# EAGLE board adafruit-cc3000-breakout (EAGLE 6.3)
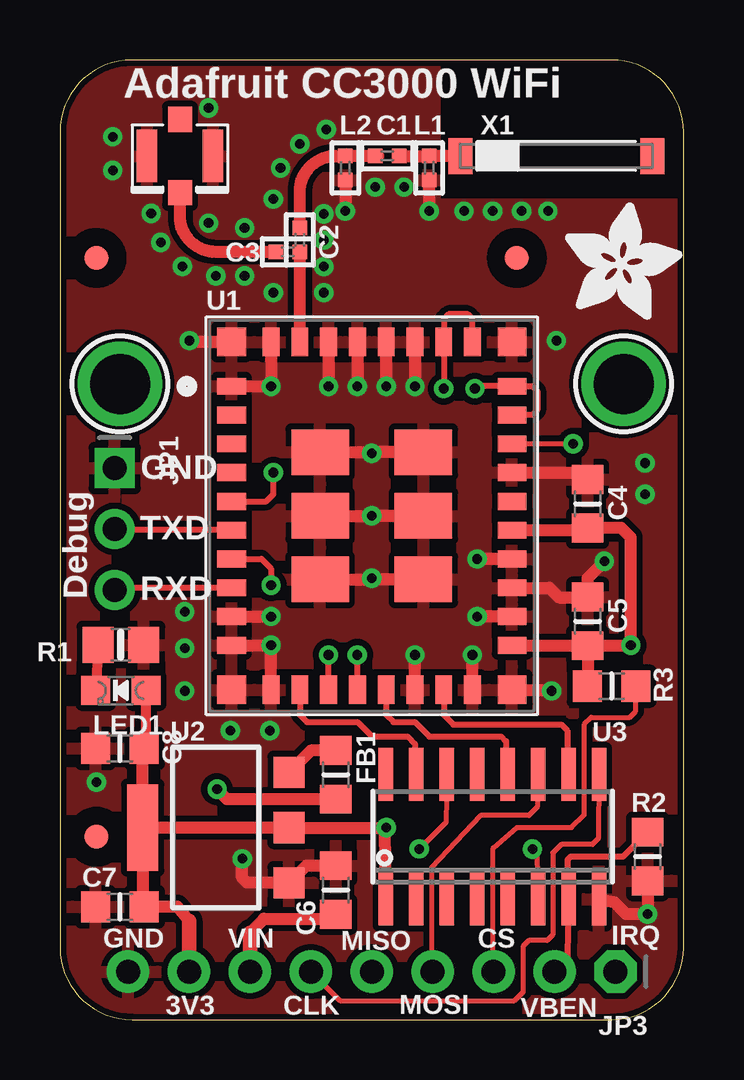
[diagram p0: board, top side]
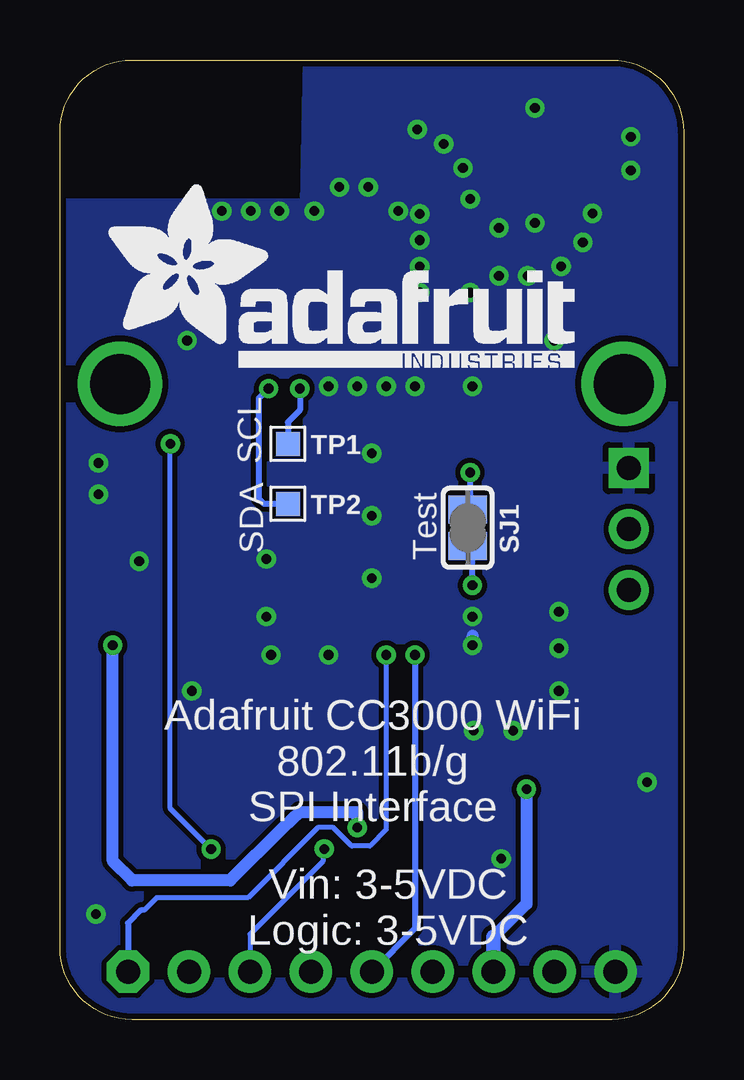
[diagram p1: board, bottom side, seen from below]

Size 26 x 40 mm. Coordinates in mm from the lower left corner, seen from the top.
Outline: 0,3 arc90 3,0 23,0 arc90 26,3 26,37 arc90 23,40 3,40 arc90 0,37 0,3
Copper layers (1*16): Top 0.035mm / dielectric 1.5mm / Bottom 0.035mm
Design rules "adafruit": minimum track width 8mil, minimum drill 15.5mil, track to track 8mil, track to pad 8mil, pad to pad 8mil, via to via 8mil, smd to smd 8mil, copper to edge 10mil, drill to drill 8mil, minimum pad ring 10mil, minimum via ring 8mil, stop-mask expansion 4mil, vias tented up to drill 20mil, thermal gap 10mil

## Footprints (pad centres in the part's own frame; a part is rotated, then mirrored left to right if it is on the bottom)
_0402 = smd 0.6 x 0.6: 1 -0.508,0; 2 0.508,0
_0805MP = smd 1.2 x 1.3: 1 -1.016,0; 2 1.016,0
FIDUCIAL_1MM = smd 1 x 1: 1 0,0
1X03_ROUND = drill 1 pad 1.676 square: 1 -2.54,0 | drill 1 pad 1.676: 2 0,0; 3 2.54,0
1X09_ROUND_70 = drill 1 pad 1.778 octagon: 1 -10.16,0 | drill 1 pad 1.778: 2 -7.62,0; 3 -5.08,0; 4 -2.54,0; 5 0,0; 6 2.54,0; 7 5.08,0; 8 7.62,0; 9 10.16,0
CHIPLED_0805_NOOUTLINE = smd 1.2 x 1.2: A 0,-1.05; C 0,1.05
0805-NO = smd 1.3 x 1.5: 1 -0.95,0; 2 0.95,0
SOLDERJUMPER_CLOSEDWIRE = smd 1.168 x 1.6: 1 -0.762,0; 2 0.762,0 | smd 0.635 x 0.203: WIRE 0,0
TESTPOINT_PAD_1MM = smd 1 x 1: P$1 0,0
CC3000MOD = smd 1.2 x 0.7: 1 -5.85,5.4; 2 -5.85,4.2; 3 -5.85,3; 4 -5.85,1.8; 5 -5.85,0.6; 6 -5.85,-0.6; 7 -5.85,-1.8; 8 -5.85,-3; 9 -5.85,-4.2; 10 -5.85,-5.4; 19 5.85,-5.4; 20 5.85,-4.2; 21 5.85,-3; 22 5.85,-1.8; 23 5.85,-0.6; 24 5.85,0.6; 25 5.85,1.8; 26 5.85,3; 27 5.85,4.2; 28 5.85,5.4 | smd 0.7 x 1.2: 11 -4.2,-7.25; 12 -3,-7.25; 13 -1.8,-7.25; 14 -0.6,-7.25; 15 0.6,-7.25; 16 1.8,-7.25; 17 3,-7.25; 18 4.2,-7.25; 29 4.2,7.25; 30 3,7.25; 31 1.8,7.25; 32 0.6,7.25; 33 -0.6,7.25; 34 -1.8,7.25; 35 -3,7.25; 36 -4.2,7.25 | smd 2.4 x 1.9: 37 -2.15,2.65; 38 -2.15,0; 39 -2.15,-2.65; 40 2.15,2.65; 41 2.15,0; 42 2.15,-2.65 | smd 1.2 x 1.2: 43 -5.85,7.25; 44 -5.85,-7.25; 45 5.85,-7.25; 46 5.85,7.25
SOT223-R = smd 1.3 x 1.3: 1 -2.3,-3.05; 2 0,-3.05; 3 2.3,-3.05 | smd 3.6 x 1.3: 4 0,3.05
SOIC16 = smd 0.6 x 2.2: 1 -4.445,-2.6; 2 -3.175,-2.6; 3 -1.905,-2.6; 4 -0.635,-2.6; 5 0.635,-2.6; 6 1.905,-2.6; 7 3.175,-2.6; 8 4.445,-2.6; 9 4.445,2.6; 10 3.175,2.6; 11 1.905,2.6; 12 0.635,2.6; 13 -0.635,2.6; 14 -1.905,2.6; 15 -3.175,2.6; 16 -4.445,2.6
MOUNTINGHOLE_2.5_PLATED = drill 2.5 pad 3.2: P$1 0,0
U.FL = smd 2.2 x 0.85: P$1 0,1.375; P$2 0,-1.375 | smd 1.05 x 1: P$3 1.525,0; P$4 -1.525,0
ANT_2500AT44M0400 = smd 1 x 1.5: FEED 4,0; NC -4,0

## Placement (x,y rotation side)
C1  2.2pF  [_0402]  13.65,36 0 top
C2  10pF  [_0402]  10,32.5 270 top
C3  DNC_10pF  [_0402]  9.5,32 180 top
C4  1µF  [_0805MP]  22,21.5 90 top
C5  1µF  [_0805MP]  22,16.6 90 top
C6  10µF  [_0805MP]  11.5,5.4 90 top
C7  10µF  [_0805MP]  2.5,4.7 180 top
C8  10µF  [_0805MP]  2.5,11.3 180 top
FB1  [_0805MP]  11.5,10.2 90 top
FID1  FIDUCIAL""  [FIDUCIAL_1MM]  19.05,31.75 0 top
FID2  FIDUCIAL""  [FIDUCIAL_1MM]  1.52,7.62 0 top
FID3  FIDUCIAL""  [FIDUCIAL_1MM]  1.52,31.75 0 top
JP1  [1X03_ROUND]  2.29,20.45 270 top
JP3  [1X09_ROUND_70]  13,2 180 top
L1  DNP  [_0402]  15.39,35.5 90 top
L2  2.2nH  [_0402]  11.9,35.5 90 top
LED1  green  [CHIPLED_0805_NOOUTLINE]  2.54,13.72 90 top
R1  470  [0805-NO]  2.54,15.62 180 top
R2  10K  [_0805MP]  24.5,6.8 90 top
R3  10K  [_0805MP]  23,13.9 0 top
SJ1  TESTMODE  [SOLDERJUMPER_CLOSEDWIRE]  9,20.5 90 bottom
TP1  SCL  [TESTPOINT_PAD_1MM]  16.5,24 0 bottom
TP2  SDA  [TESTPOINT_PAD_1MM]  16.5,21.5 0 bottom
U1  CC3000MOD  [CC3000MOD]  13,21 0 top
U2  [SOT223-R]  6.5,8 90 top
U3  74HC4050D  [SOIC16]  18.03,7.62 0 top
U$8  [ADAFRUIT_5MM]  21.07,29.18 0 top
U$24  MOUNTINGHOLE2.5  [MOUNTINGHOLE_2.5_PLATED]  2.5,26.5 0 top
U$34  MOUNTINGHOLE2.5  [MOUNTINGHOLE_2.5_PLATED]  23.5,26.5 0 top
U$35  U.FL  [U.FL]  5,36 270 top
U$36  [ADAFRUIT_TEXT_20MM]  24.13,27.18 0 bottom
X1  2500AT44M0400E  [ANT_2500AT44M0400]  20.69,36 180 top

## Library data of the parts
C1-C8 FB1 L1 L2 LED1 R1-R3 SJ1 TP1 TP2 U1-U3 U$8 U$35 U$36 X1 = microbuilder
FID1 FID2 U$24 U$34 = microbuilder; BOM: EXCLUDE
FID3 = microbuilder; BOM: EXCLUDE; COMPANY: ADAFRUIT INDUSTRIES; DRAWN: KTOWN; REV: C
JP1 JP3 = microbuilder; COMPANY: ADAFRUIT INDUSTRIES; DRAWN: KTOWN; REV: C

## Nets
GND: C4.2 C5.2 C6.2 C7.2 C8.2 JP1.1 JP3.9 L1.1 L2.1 R1.1 R2.1 U1.1 U1.9 U1.10 U1.11 U1.16 U1.18 U1.20 U1.21 U1.22 U1.25 U1.31 U1.32 U1.33 U1.34 U1.36 U1.37 U1.38 U1.39 U1.40 U1.41 U1.42 U1.43 U1.44 U1.45 U1.46 U2.1 U3.8 U$35.P$1 U$35.P$2
N$1: C1.2 L1.2 X1.FEED
N$2: C1.1 C2.1 L2.2
N$3: C3.2 U$35.P$3
N$4: C2.2 C3.1 U1.35
N$5: SJ1.2 U1.5
N$6: SJ1.1 U1.7
N$7: LED1.C R1.2
N$9: FB1.2 U2.3
RXD_3V: JP1.3 U1.8
SCL_3V: TP1.P$1 U1.29 U1.30
SDA_3V: TP2.P$1 U1.27 U1.28
SPI_CLK_3V: U1.17 U3.10
SPI_CLK_5V: JP3.6 U3.9
SPI_CS_3V: U1.12 U3.15
SPI_CS_5V: JP3.3 R3.2 U3.14
SPI_IRQ_3V: JP3.1 U1.14
SPI_MISO_3V: JP3.5 U1.13
SPI_MOSI_3V: U1.15 U3.12
SPI_MOSI_5V: JP3.4 U3.11
TXD_3V: JP1.2 U1.6
VBAT: C4.1 C5.1 C7.1 C8.1 JP3.8 LED1.A R3.1 U1.19 U1.23 U2.2 U2.4 U3.1
VBAT_EN_3V: U1.26 U3.6
VBAT_EN_5V: JP3.2 R2.2 U3.7
VIN: C6.1 FB1.1 JP3.7

## Tracks (layer width: path | path; a pad name or v marks a point on that pad's centre or on a via)
GND  (via drill 0.4)
  Top 0.5: U1.10 v8.8,15.6 U1.11 | U1.9 v8.8,16.8 | U1.37 12.95,23.65 v13,23.6 13.05,23.65 U1.40 | U1.38 v13,21 U1.41 | U1.39 12.95,18.35 v13,18.4 13.05,18.35 U1.42 | v22.7,19.1 22,18.4 C5.2 21.98,17.6 20.8,17.6 20.4,18 U1.21 | U1.25 21.72,22.8 C4.2 | U1.22 v17.4,19.2 | U1.20 v17.4,16.8 | U1.16 v14.8,15.2 | U1.18 v17.2,15.2 | U1.45 20.45,13.75 v20.5,13.7 | R2.1 v24.5,4.4 23.6,4.4 23.1,4.9 U3.8 | C6.2 10.27,6.42 U2.1 7.8,5.7 7.6,5.9 v7.6,6.7 | 1.5,4.68 C7.2 | U1.1 v8.8,26.4 U1.36 | U1.34 v11.2,26.4 | U1.33 v12.4,26.4 | U1.32 v13.6,26.4 | U1.31 v14.8,26.4 | U1.43 5.45,28.25 v5.4,28.3 | L2.1 v11.9,33.7 | L1.1 v15.39,33.7
  Bottom 0.5: v8.8,15.6 8.8,16
  other vias: 5.2,13.7 11,30.3 8.9,30.3 7.7,33 6.2,33.2 7.7,31 6.5,31 5.1,31.4 8.9,34.2 9.2,35.5 10,36.5 11.1,37.1 13.15,34.7 14.35,34.7 2.2,36.8 2.2,35.4 6.2,38 4.2,32.4 3.8,33.6 20.7,28.3 24.4,23.2 24.4,21.9 16.85,33.7 18.05,33.7 19.25,33.7 20.35,33.7 11,33.59 11,32.49 11,31.39 1.52,9.89 5.2,15.48 5.2,17 7.11,12.05 8.76,12.05
  pour Bottom: 3,0 23,0 arc90 26,3 26,34 15.75,34 15.62,40 3,40 arc90 0,37 0,3 arc90
  pour Top (isolate 0.254): 15.62,40 15.62,34 26,34 26,3 arc-90 23,0 3,0 arc-90 0,3 0,37 arc-90 3,40
N$1
  Top 0.508: C1.2 15.48,36 | L1.2 X1.FEED
  Top 0.584: 15.48,36 arc90 L1.2
N$2
  Top 0.508: C2.1 10,34.5 arc-90 11.5,36 11.99,36 | L2.2 13.23,36.01
  Top 0.584: 11.99,36 arc90 L2.2 | 13.23,36.01 arc-90 C1.1
N$3
  Top 0.508: C3.2 6.5,32 arc-90 5,33.5 U$35.P$3
N$4
  Top 0.508: U1.35 C2.2 C3.1
N$5  (via drill 0.4)
  Top 0.25: U1.5 8.6,21.6 8.9,21.9 v8.9,22.8
  Bottom 0.25: v8.9,22.8 8.9,21.36 SJ1.2
N$6  (via drill 0.4)
  Top 0.25: U1.7 8.4,19.2 8.8,18.8 v8.8,18.1
  Bottom 0.25: v8.8,18.1 8.8,19.54 SJ1.1
N$7
  Top 0.406: 1.52,13.59 LED1.C 1.52,13.72 R1.2
N$9
  Top 0.5: FB1.2 10.47,11.22 U2.3
RXD_3V
  Top 0.254: U1.8 2.29,18 JP1.3
SCL_3V  (via drill 0.4)
  Top 0.25: U1.29 17.2,29.2 17,29.4 16.2,29.4 16,29.2 U1.30 v16,26.3
  Bottom 0.25: v16,26.3 16,25.4 16.5,24.9 TP1.P$1
SDA_3V  (via drill 0.4)
  Top 0.25: U1.27 19.7,25.2 19.9,25.4 19.9,26.2 19.7,26.4 U1.28 17.4,26.4 v17.3,26.3
  Bottom 0.25: TP2.P$1 17.5,21.5 17.7,21.7 17.7,24.9 17.7,25.9 v17.3,26.3
SPI_CLK_3V
  Top 0.25: U1.17 16,12.7 16.4,12.3 20.9,12.3 21.15,12.05 21.15,10.12 U3.10 21.1,10.18
SPI_CLK_5V
  Top 0.203: 20.55,6.95 20.55,3.53 20.32,3.3 19.56,3.3 19.3,3.05 19.3,1.14 18.92,0.76 11.7,0.76 JP3.6
  Top 0.21: U3.9 22.45,7.54 22.2,7.3 20.9,7.3 20.55,6.95
SPI_CS_3V
  Top 0.25: U1.12 10,12.7 10.3,12.4 12.4,12.4 13,11.8 14.5,11.8 14.8,11.5 14.8,10.12 U3.15
SPI_CS_5V  (via drill 0.4)
  Top 0.203: U3.14 16.09,8.22 v14.99,7.11 | JP3.3 18.03,2 18.03,7.11 18.08,7.16 19.05,8 21.33,8 21.84,8.52 21.84,12.29 22.15,12.6
  Top 0.21: 22.15,12.6 23.75,12.6 24,12.85 24,13.88
  Top 0.25: 24,13.88 R3.2
  Bottom 0.203: v14.99,7.11 15.03,6.6 18.08,3.56 JP3.3
SPI_IRQ_3V  (via drill 0.4)
  Top 0.25: U1.14 v12.4,15.2
  Bottom 0.203: v12.4,15.2 12.4,7.92 13.08,7.24 13.84,7.24 14.61,8 15.24,8 18.16,5.08 21.97,5.08 22.48,4.57 22.61,4.57
  Bottom 0.254: 22.61,4.57 23.16,4.02 JP3.1
SPI_MISO_3V  (via drill 0.4)
  Top 0.25: U1.13 v11.2,15.2
  Bottom 0.25: v11.2,15.2 11.2,3.8
  Bottom 0.254: 11.2,3.8 JP3.5
SPI_MOSI_3V
  Top 0.25: U1.15 13.6,12.7 13.9,12.4 14.8,12.4 15.4,11.8 18.4,11.8 18.6,11.6 18.6,10.13 U3.12
SPI_MOSI_5V
  Top 0.203: U3.11 19.91,8.86 19.56,8.51 17.53,8.51 15.49,6.35 15.49,2.05 JP3.4
TXD_3V
  Top 0.254: U1.6 2.29,20.4 JP1.2
VBAT  (via drill 0.4)
  Top 0.406: C8.1 3.59,11.3 LED1.A
  Top 0.5: U3.1 13.55,7.95 v13.6,8 U2.2 U2.4 | 5.38,4.12 4.9,4.7 C7.1 3.45,4.57 U2.4 | U1.19 21.98,15.6 | 21.98,15.6 C5.1 22,13.92 R3.1 | U1.23 21.92,20.4 C4.1 22.02,20.5 23.4,20.5 23.8,20.1 v23.8,15.6 21.98,15.6 | U2.4 3.45,11.23 C8.1
  Top 0.61: 5.38,4.12 JP3.8
  Bottom 0.5: v13.6,8 13.6,8.64 16,8.64 16.7,8 18.9,5.8 23,5.8 23.8,6.6 v23.8,15.6
VBAT_EN_3V  (via drill 0.4)
  Top 0.21: U3.6 19.91,6.89 v19.7,7.1 | v21.4,24 U1.26
  Bottom 0.21: v19.7,7.1 21.4,8.8 v21.4,24
VBAT_EN_5V
  Top 0.25: U3.7 21.18,6.67 21.3,6.8 23.48,6.8 R2.2
  Top 0.254: JP3.2 21.18,2.56 U3.7
VIN  (via drill 0.4)
  Top 0.5: 7.92,3.62 8.5,4.2 11.32,4.2 C6.1 | FB1.1 6.97,9.18 v6.55,9.6
  Top 0.61: 7.92,3.62 JP3.7
  Bottom 0.5: v6.55,9.6 6.55,4.82 7.92,3.45
  Bottom 0.61: 7.92,3.45 JP3.7

## Text on the board
tPlace: Adafruit CC3000 WiFi | GND | TXD | Debug | RXD | GND | VIN | MISO | CS | IRQ | 3V3 | CLK | MOSI | VBEN
bPlace: Test | Adafruit CC3000 WiFi / 802.11b/g / SPI Interface | Vin: 3-5VDC / Logic: 3-5VDC